# Altium PCB IMOB_TAG_hv2.PcbDoc
Units mm, origin at the board's own origin, x right, y up, seen from the top; angles counter-clockwise.
Board outline 26.1 x 35 mm, 2 copper layers (Top Layer, Bottom Layer); 33 components, 23 nets, 104 pads, 134 vias.
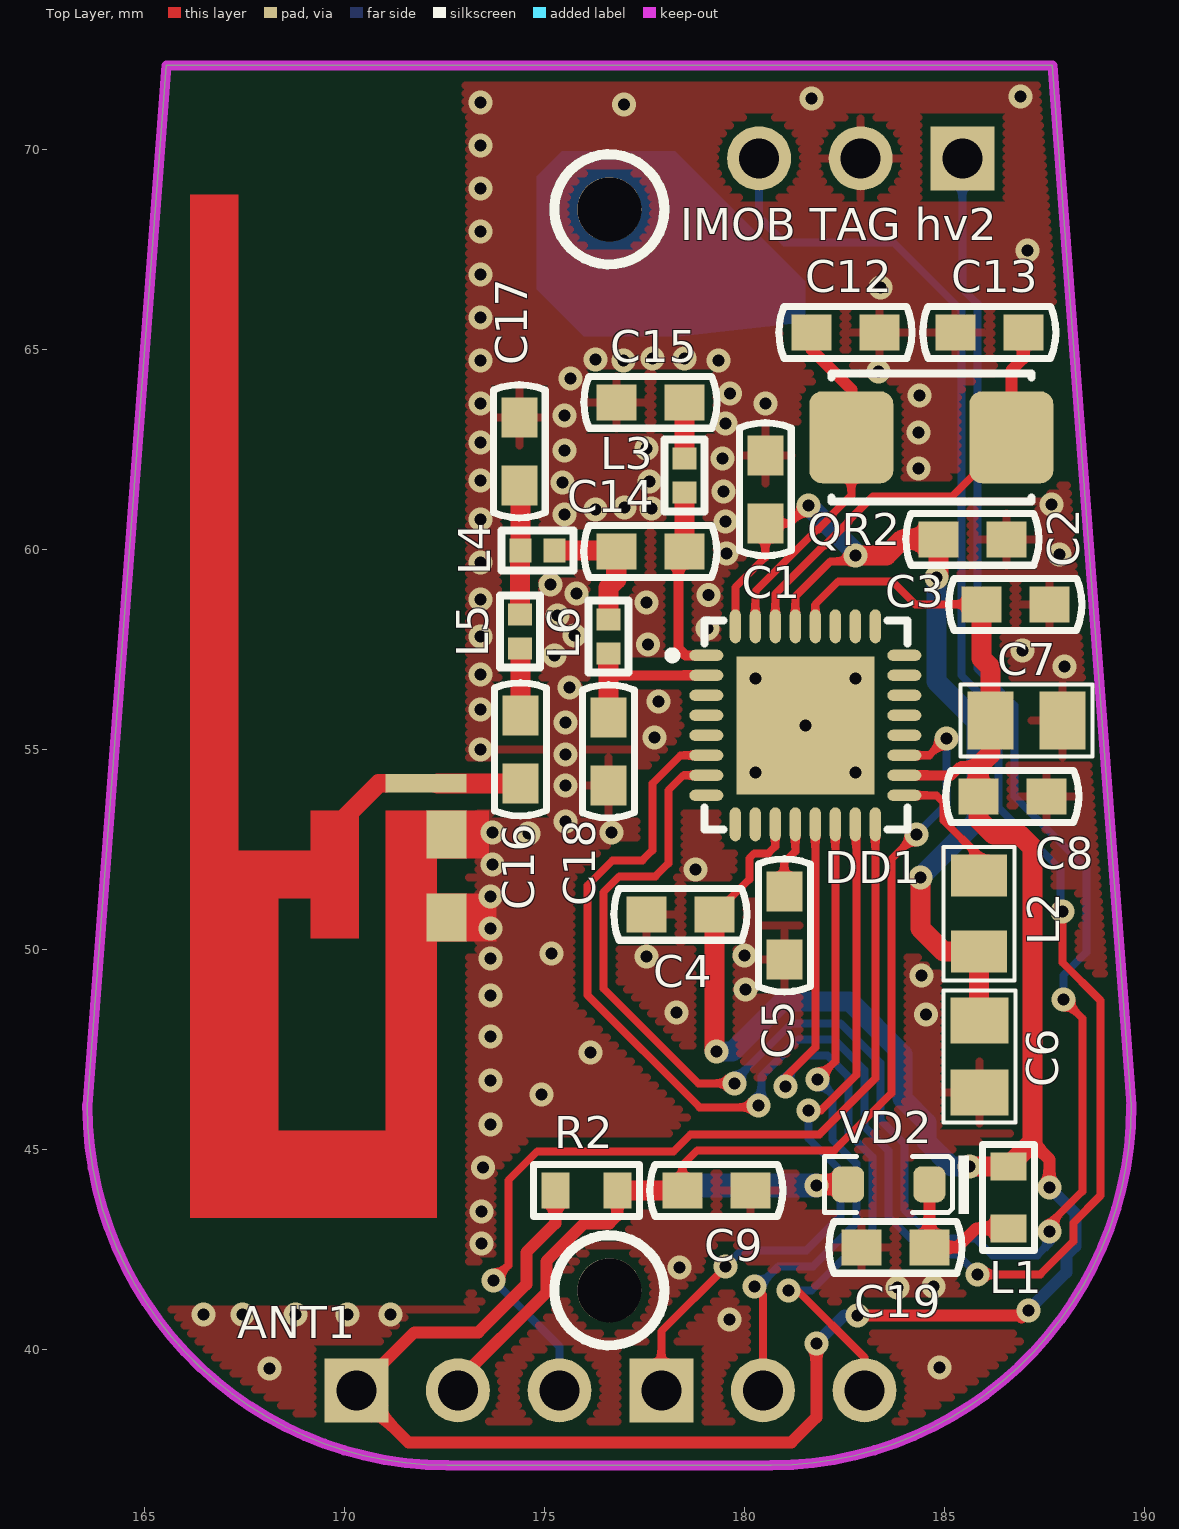
[diagram p0: Top Layer view]
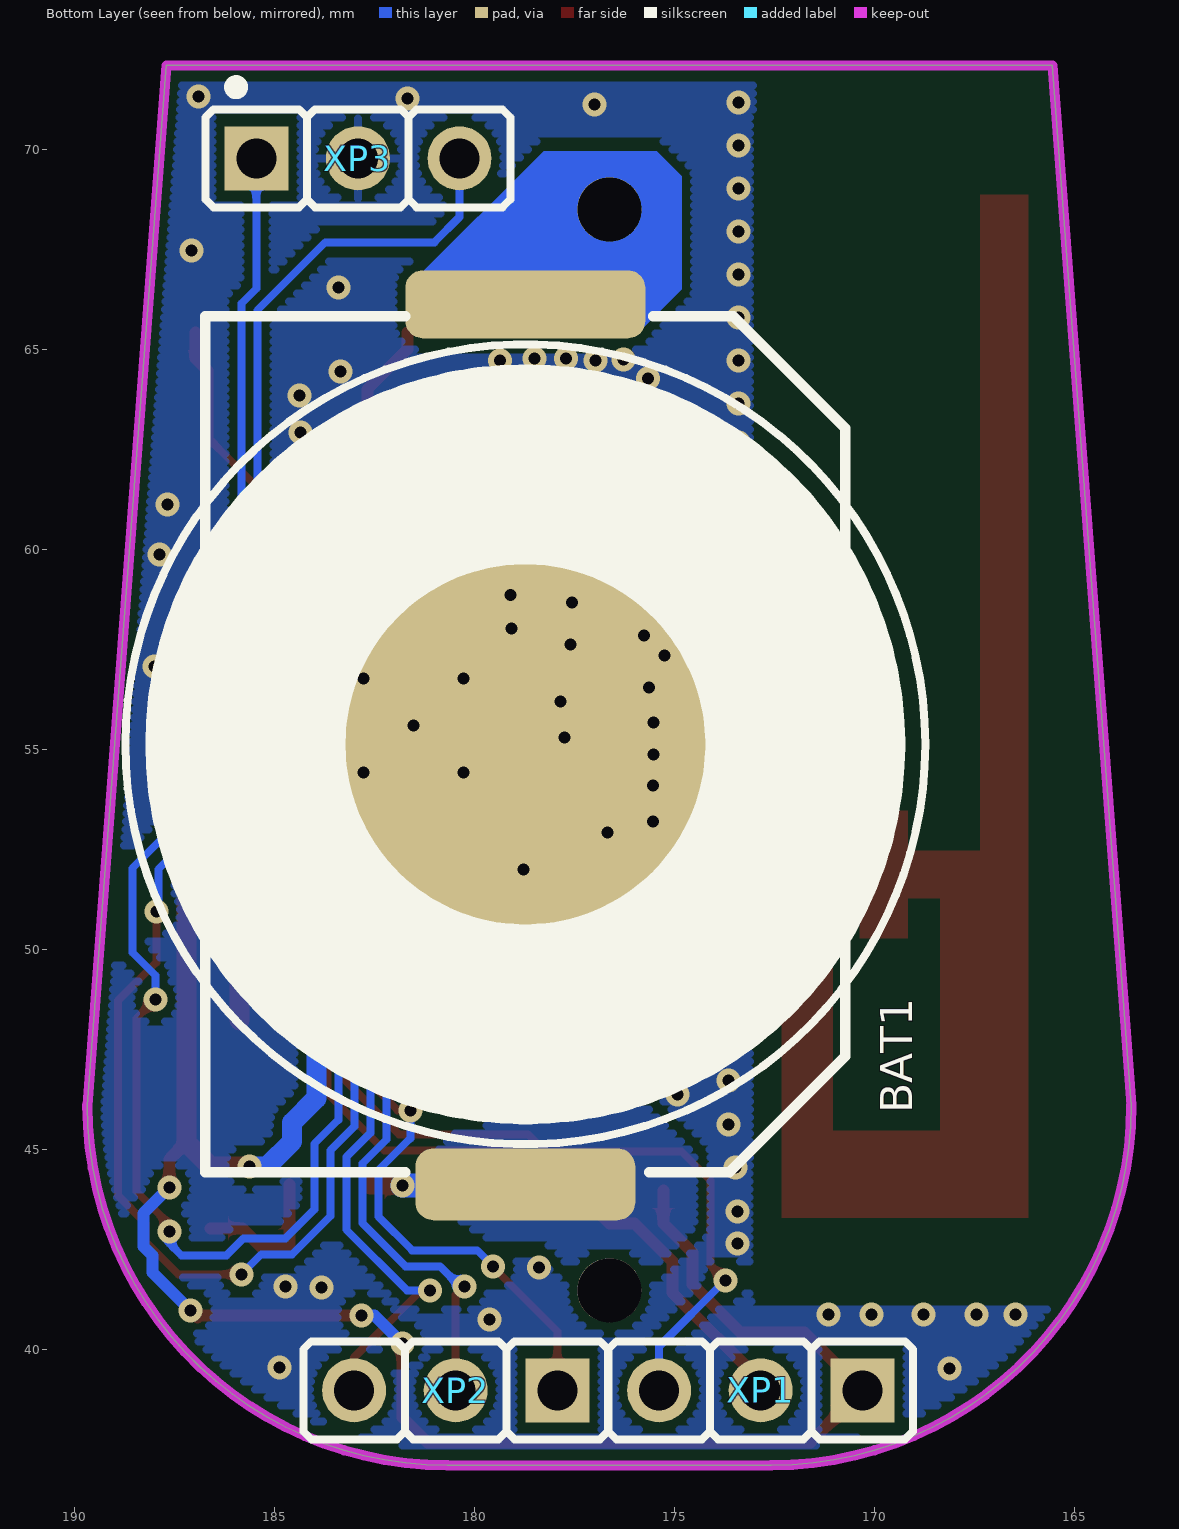
[diagram p1: Bottom Layer view, seen from below]
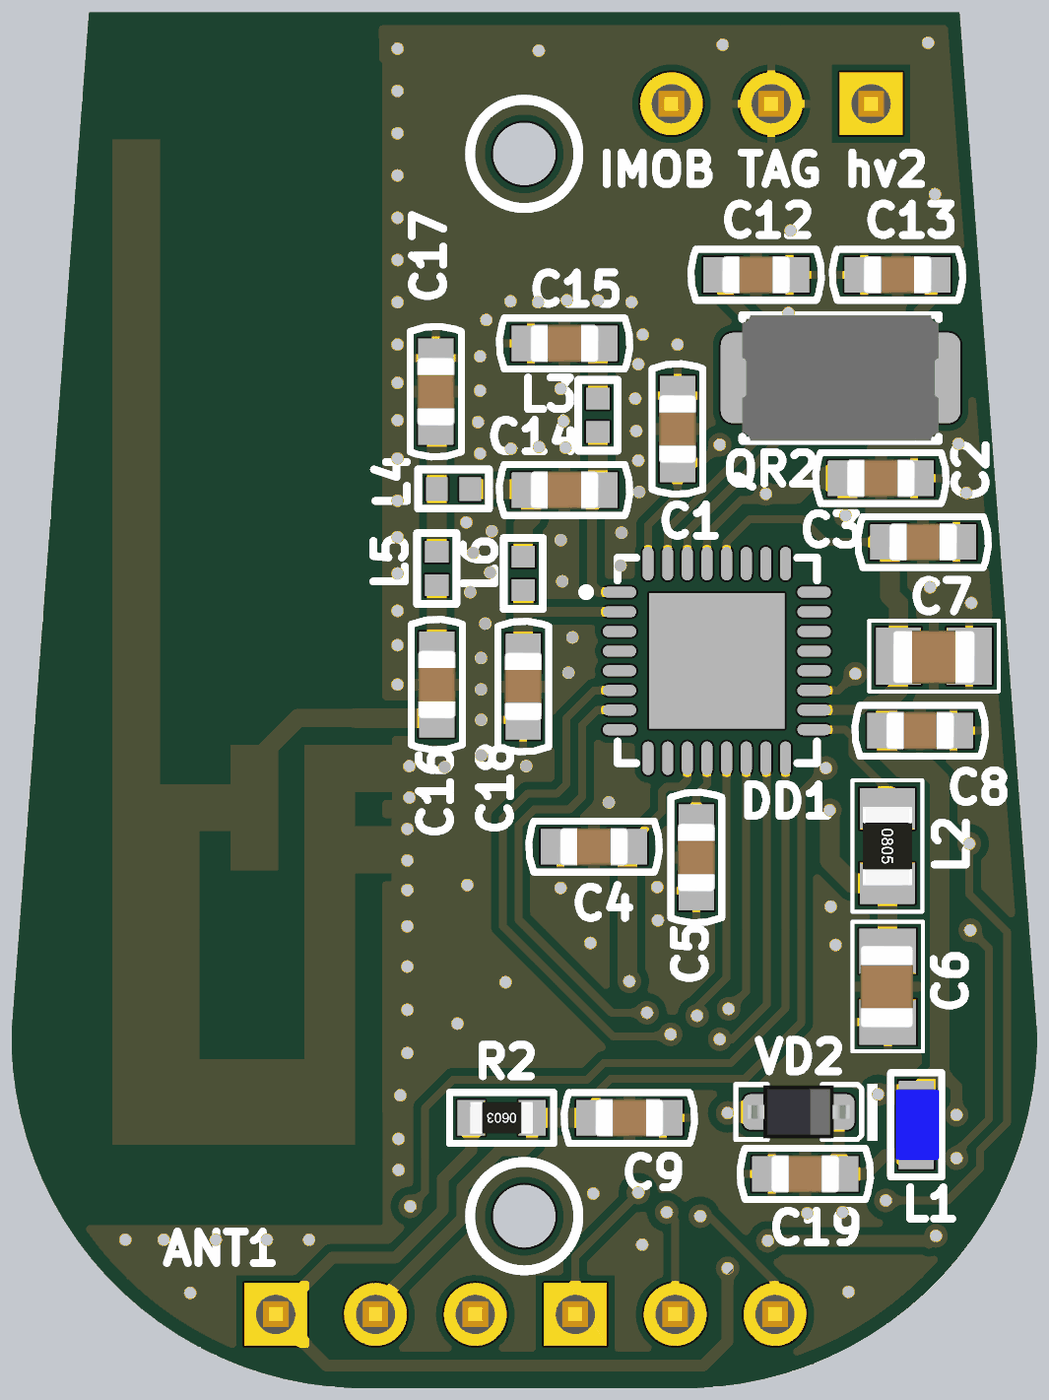
[diagram p2: 3D render of the assembled board from above, using the file's embedded part models]
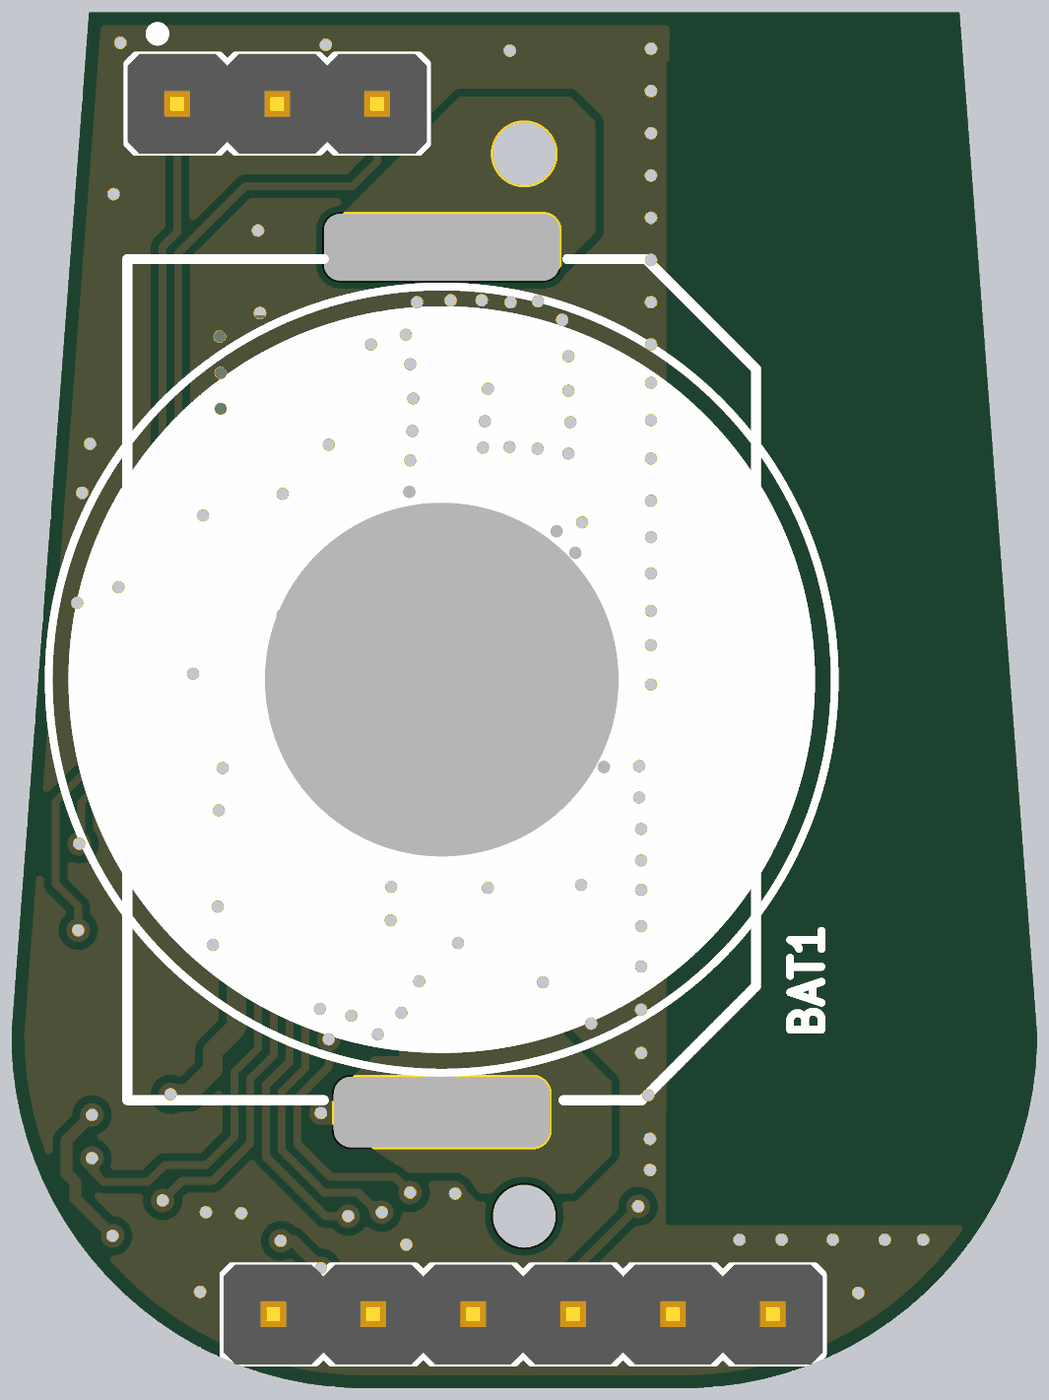
[diagram p3: 3D render of the assembled board from below, using the file's embedded part models]

## Layer stack, top to bottom
Top Solder: solder mask 0.0102, Solder Resist, Dk 3.5
Top Layer: signal copper 0.0356
Dielectric 1: dielectric 0.32, FR-4, Dk 4.8
Bottom Layer: signal copper 0.0356
Bottom Solder: solder mask 0.0102, Solder Resist, Dk 3.5

## Board outline
163.575,46.1 ccw(c172.575,46.1) 172.575,37.1 180.675,37.1 ccw(c180.675,46.1) 189.675,46.1 187.7,72.1 165.55,72.1

## Design rules (kind name [scope] priority, off if disabled: settings)
Clearance [All] p1: gap=0.2 ignorepadtopadclearanceinfootprint=FALSE
ComponentClearance [All] p1: gap=0.05 collisioncheckmode=3 verticalgap=2540 showdistances=FALSE
HoleToHoleClearance [All] p1: gap=0.05 allowstackedmicrovias=TRUE
MinimumSolderMaskSliver [All] p1: minsoldermaskwidth=0.05
PolygonConnect DIRECT [InComponent('BAT1')] p1: connectstyle=Direct reliefconductorwidth=0.254 reliefentries=4 polygonreliefangle="90 Angle" airgapwidth=0.254
PolygonConnect VIA [IsVia] p2: connectstyle=Direct reliefconductorwidth=0.254 reliefentries=4 polygonreliefangle="90 Angle" airgapwidth=0.254
PolygonConnect [All] p3: connectstyle=Relief reliefconductorwidth=0.2 reliefentries=4 polygonreliefangle="90 Angle" airgapwidth=0.2
RoutingVias [All] p1: holewidth=0.4 width=0.8 viastyle="Through Hole" minholewidth=0.3 minwidth=0.6 maxholewidth=0.5 maxwidth=1
ShortCircuit ANTENNA [InComponent('ANT1')] p1: allowed=TRUE
ShortCircuit [All] p2: allowed=FALSE
SilkToSilkClearance [All] p1: silktosilkclearance=0.05
SilkToSolderMaskClearance [IsPad] p1: minsilkscreentomaskgap=0.05 clearancetoexposedcopper=TRUE
SolderMaskExpansion [All] p1: expansion=0.102
Width [All] p1: maxlimit=3 minlimit=0.2 preferedwidth=0.5
24 further rules are at their usual default settings.

## Classes and differential pairs
component class [5]-CONNECTORS: BAT1 C19 VD2 XP1 XP2 XP3
component class [4]-RF: ANT1 C14 C15 C16 C17 C18 L3 L4 L5 L6
component class [3]-MCU: C1 C2 C3 C4 C5 C6 C7 C8 C9 C12 C13 DD1 L1 L2 QR2 R2

## Components (designator, comment, footprint, x,y, rotation, side; value= is the part's Value field where it differs from the comment)
ANT1 "IFA_TI_2.4G_Reference" ANT_IFA_2.4G_BEST 172.98,54.15 r90 top
BAT1 "3034TR" 3034-TR 178.625,55.125 r90 bottom locked
C1 "0.1uF" CC0603 180.525,61.5 r90 top
C2 "0.1uF" CC0603 185.7,60.25 r0 top
C3 "0.1uF" CC0603 186.775,58.625 r180 top
C4 "0.1uF" CC0603 178.4,50.875 r0 top
C5 "1uF" CC0603 181,50.6 r270 top
C6 "10uF" CC0805 185.875,47.315 r90 top
C7 "10uF" CC0805 187.05,55.725 r180 top
C8 "0.1uF" CC0603 186.7,53.825 r180 top
C9 "0.1uF" CC0603 179.3,43.975 r180 top
C12 "22pF" CC0603 182.525,65.423 r0 top
C13 "22pF" CC0603 186.125,65.425 r180 top
C14 "1pF" CC0603 177.65,59.95 r180 top
C15 "6.8pF" CC0603 177.65,63.675 r0 top
C16 "12pF" CC0603 174.4,55 r270 top
C17 "1pF" CC0603 174.375,62.45 r90 top
C18 "1pF" CC0603 176.6,54.95 r270 top
C19 "0.1uF" CC0603 183.775,42.55 r0 top
DD1 "CC2650" QFN32_TI 179.05,57.35 r0 top
Designator4 "Comment" Keystone_2991 201.875,56.025 r0 top
L1 "BLM18HE152SN1" L0603 186.6,43.8 r90 top
L2 "10uH" RC0805 185.865,50.89 r270 top
L3 "2.4nH" L0402 178.5,61.85 r270 top
L4 "2nH" L0402 174.825,59.975 r180 top
L5 "2nH" L0402 174.397,57.95 r270 top
L6 "2.4nH" L0402 176.6,57.825 r90 top
QR2 "SJK-6L-24.0" AC5032_2 184.675,62.8 r0 top
R2 "100k" RC0603 176.05,43.975 r180 top
VD2 "PMEG1020EJ" SOD323 183.609,44.125 r0 top
XP1 "n.p" PLS-03 170.3,38.975 r0 bottom
XP2 "n.p" PLS-03 177.925,38.975 r0 bottom
XP3 "n.p" PLS-03 185.45,69.775 r180 bottom

## Footprints (in the part's own frame and the unit in brackets; to place one, negate y for a bottom-side part, rotate by r counter-clockwise, add the part's x,y. Pads: shape width x height; smd on the part's side, far side on the other; paste and mask are expansions set on the pad)
3034-TR [mm] "CR2032 Holder"
  rrect50% 1.8x5.5 smd mask+0.05: 1(-11,0.1)
  rrect50% 1.7x6 smd mask+0.05: 1(11,0.1)
  round 10 smd mask+0.05: 2(0,0.1)
  silkscreen extent -10.7,-9.9 10.7,10.1
AC5032_2 [mm]
  rrect30% 2.1x2.3 smd mask+0.05: 1(-2,0) 2(2,0)
  silkscreen extent -2.5,-1.6 2.5,1.6, body extent -2.5,-1.6 2.5,1.6, height 1.2
ANT_IFA_2.4G_BEST [mm]
  rect 0.46x2.03 smd paste-10 mask+0.05: 1(-0.003,0.937)
  rect 1.2x1 smd paste-10 mask+0.05: 2(-3.35,0.43) 2(-1.285,0.423)
  Top Layer region: -3.883,2.615 -0.683,2.615 -0.683,3.825 -3.883,3.825
  Top Layer region: -8.8,4.624 -1.684,4.624 -1.684,5.8 -8.8,5.8
  Top Layer region: -10.864,0.662 -0.684,0.662 -0.684,1.952 -10.864,1.952
  Top Layer region: -1.884,-0.078 -0.684,-0.078 -0.684,1.952 -1.884,1.952
  Top Layer region: -3.949,-0.078 -2.749,-0.078 -2.749,1.952 -3.949,1.952
  Top Layer region: -10.864,0.662 -8.683,0.662 -8.683,6.832 -10.864,6.832
  Top Layer region: -10.864,5.623 14.716,5.623 14.716,6.832 -10.864,6.832
  Top Layer region: -2.883,3.7 -1.684,3.7 -1.684,4.7 -2.883,4.7
  Top Layer pour cut-out: -12.914,7.493 -12.914,-0.132 16.769,-0.132 16.769,7.493
  Top Layer lines w0.2: -0.003,2.118 -0.003,1.2
  Top Layer lines w0.46: -0.931,3.046 -0.003,2.118 -0.003,1.952
  Bottom Layer pour cut-out: -12.914,7.493 -12.914,-0.132 16.769,-0.132 16.769,7.493
CC0603 [mm]
  rect 1x0.9 smd paste-25.4 mask+0.05: 1(-0.85,0) 2(0.85,0)
  silkscreen extent -1.66,-0.65 1.66,0.65, body extent -0.87,-0.47 0.88,0.48, height 0.85
CC0805 [mm]
  rect 1.15x1.45 smd paste-25.4 mask+0.05: 1(-0.9,0) 2(0.9,0)
  silkscreen extent -1.65,-0.9 1.65,0.9, body extent -1.05,-0.65 1.05,0.7, height 1.1
Keystone_2991 [mm]
  rect 1.57x1.52 smd: 1(0,0) 1(9.35,0)
  silkscreen extent -1.1,-3.22 10.43,3.12
L0402 [mm]
  rect 0.55x0.6 smd mask+0.05: 1(-0.425,0) 2(0.425,0)
  silkscreen extent -0.9,-0.5 0.9,0.5
L0603 [mm]
  rect 0.7x0.9 smd paste-25.4 mask+0.05: 1(-0.775,0) 2(0.774,0)
  silkscreen extent -1.32,-0.65 1.33,0.65, body extent -0.9,-0.58 0.9,0.54, height 1
PLS-03 [mm]
  rect 1.6x1.6 hole 1 mask+0.05: 1(0,0)
  round 1.6 hole 1 mask+0.05: 2(2.54,0) 3(5.08,0)
  silkscreen extent -1.27,-1.23 6.35,1.23, body extent -1.27,-1.27 6.35,1.27, height 10.1
QFN32_TI [mm]
  oval 0.85x0.28 smd mask+0.05: 1(0,0) 2(0,-0.5) 3(0,-1) 4(0,-1.5) 5(0,-2) 6(0,-2.5) 7(0,-3) 8(0,-3.5) 17(4.95,-3.5) 18(4.95,-3) 19(4.95,-2.5) 20(4.95,-2) 21(4.95,-1.5) 22(4.95,-1) 23(4.95,-0.5) 24(4.95,0)
  oval 0.28x0.85 smd mask+0.05: 9(0.725,-4.225) 10(1.225,-4.225) 11(1.725,-4.225) 12(2.225,-4.225) 13(2.725,-4.225) 14(3.225,-4.225) 15(3.725,-4.225) 16(4.225,-4.225) 25(4.225,0.725) 26(3.725,0.725) 27(3.225,0.725) 28(2.725,0.725) 29(2.225,0.725) 30(1.725,0.725) 31(1.225,0.725) 32(0.725,0.725)
  rect 3.45x3.45 smd mask+0.05: 33(2.475,-1.75)
  silkscreen extent -0.95,-4.35 5.02,0.87
RC0603 [mm]
  rect 0.7x0.9 smd paste-25.4 mask+0.05: 1(-0.775,0) 2(0.774,0)
  silkscreen extent -1.32,-0.65 1.33,0.65, body extent -0.8,-0.4 0.8,0.4, height 0.45
RC0805 [mm]
  rect 1.05x1.4 smd paste-25.4 mask+0.05: 1(-0.95,0) 2(0.95,0)
  silkscreen extent -1.67,-0.89 1.67,0.89, body extent -1,-0.62 1,0.63, height 0.6
SOD323 [mm]
  rrect50% 0.8x0.9 smd mask+0.05: 1(-1.016,0) 2(1.016,0)
  silkscreen extent -1.6,-0.74 2,0.72, body extent -1.3,-0.67 1.3,0.67, height 1.1

## Part data
ANT1: library part ANT_WiFi_IFA_BEST
BAT1: library part 3034, "CR2032 holder smd"
C1 C2 C3 C4 C5 C8 C9 C12 C13 C14 C15 C16 C17 C18 C19: library part CC0603, "CC0603"
C6 C7: library part CC0805, "CC0805"
DD1: library part CC2650RHB, "CC2650RHBT"
L1: library part L0603, "L0603"
L2: library part L0805, "L0805"
L3 L4 L5 L6: library part L0402, "L0402"
QR2: library part AC5032_2, "AC5032/2"
R2: library part RC0603, "RC0603"
VD2: library part PMEG2010
XP1 XP2 XP3: library part PLS03, "PLS03"

## Free pads (board coordinates)
  round 1.6 hole 1.6 unplated mask+0.05: 0(176.625,41.475) 0(176.625,68.5)

## Via types
v1: diameter 0.6, hole 0.3, Top Layer to Bottom Layer, tented both sides, 134 vias

## Nets (pads, with @x,y where several pads share a name; then routed paths per layer and width w, separated by ;. In a path a pad name is that pad's centre, name@x,y a point inside that pad or via, vN(x,y) a via of type N, cw(c..) or ccw(c..) an arc to the next point about the centre after c; other vN are vias at no path point)
+3V: C19.2 L1.1 VD2.2 | length 3.7
  Top Layer w0.3: VD2.2 C19.2 185.325,42.55 185.8,43.025 L1.1
+3V_F: C3.2 C4.2 C7.2 C8.2 DD1.11 DD1.18 DD1.28 L1.2 R2.2 XP1.1 | length 72.5
  Top Layer w0.2: C4.2 180.125,51.75 180.125,52.275 180.25,52.4 180.6,52.4 180.775,52.575 DD1.11 ; DD1.28 181.775,58.625 182.35,59.2 183.7,59.2 184.275,58.625 C3.2
  Top Layer w0.25: DD1.18 185.175,54.35 185.4,54.575 185.85,54.575
  Top Layer w0.3: R2.2 175.276,43.151 174.55,42.425 174.55,41.625 173.35,40.425 171.75,40.425 XP1.1 171.6,37.675 181.175,37.675 181.8,38.3 v1(181.8,40.15) ; v1(182.825,40.85) 186.875,40.85 186.925,40.8 v1(187.1,40.975) ; 187.2,45.174 187.625,44.749 v1(187.625,44.05)
  Top Layer w0.5: C4.2 179.25,47.5 v1(179.3,47.45) ; v1(185.625,44.575) 186.599,44.575 187.2,45.174 187.2,52.55 186.875,52.875 186.225,52.875 185.85,53.25 C8.2 185.85,54.575 186.15,54.875 C7.2 186.15,57.05 185.925,57.275 C3.2
  Bottom Layer w0.3: v1(181.8,40.15) 182.5,40.85 v1(182.825,40.85) ; v1(187.1,40.975) 188.05,41.925 188.05,42.348 188.275,42.574 188.275,43.4 v1(187.625,44.05)
  Bottom Layer w0.5: v1(179.3,47.45) 179.708,47.45 180.958,48.7 182.633,48.7 183.95,47.383 183.95,46.275 184.553,45.672 184.553,45.197 185.175,44.575 v1(185.625,44.575)
BT_RX: DD1.7 XP3.1 | length 53.6
  Top Layer w0.2: DD1.7 178.475,54.35 178.1,53.975 178.1,52.15 177.775,51.825 176.875,51.825 176.475,51.425 176.475,49.025 178.85,46.65 v1(179.75,46.65) ; v1(187.625,42.95) 187.625,43.125 188.45,43.95 188.45,48.275 v1(187.975,48.75)
  Bottom Layer w0.2: v1(179.75,46.65) 179.75,46.714 181.186,48.15 182.405,48.15 183.4,47.155 183.4,45.738 184,45.138 184,43.494 184.719,42.775 185.774,42.775 186.199,42.35 187.325,42.35 187.625,42.65 v1(187.625,42.95) ; XP3.1 185.45,66.516 185.825,66.141 185.825,57.018 186.75,56.093 186.75,53.825 188.55,52.025 188.55,49.925 187.975,49.35 v1(187.975,48.75)
BT_TX: DD1.6 XP3.3 | length 59.5
  Top Layer w0.2: DD1.6 178.409,54.85 177.7,54.141 177.7,52.475 177.45,52.225 176.709,52.225 176.075,51.591 176.075,48.859 178.884,46.05 180.3,46.05 v1(180.35,46.1) ; v1(185.825,41.875) 187.4,41.875 188.225,42.7 188.225,43.159 188.908,43.842 188.908,48.717 187.95,49.675 v1(187.95,50.95)
  Bottom Layer w0.2: v1(180.35,46.1) 180.425,46.175 180.425,46.824 181.351,47.75 182.239,47.75 183,46.989 183,45.572 183.6,44.972 183.6,43.328 184.553,42.375 185.325,42.375 v1(185.825,41.875) ; XP3.3 180.37,68.305 181,67.675 183.725,67.675 185.425,65.975 185.425,56.853 186.35,55.928 186.35,53.55 187.9,52 187.9,51 v1(187.95,50.95)
GND: ANT1.2 BAT1.2 C1.2 C2.2 C3.1 C4.1 C5.2 C6.1 C7.1 C8.1 C9.1 C12.2 C13.2 C15.1 C17.2 C18.2 C19.1 DD1.33 XP3.2
  other v1: 168.125,39.524 184.875,39.55 179.625,40.75 166.475,40.875 167.452,40.875 168.775,40.875 170.075,40.875 171.15,40.875 183.825,41.55 184.725,41.575 178.383,42.05 173.425,42.65 173.425,43.442 173.47,44.55 173.65,45.625 174.925,46.375 173.65,46.725 176.15,47.425 173.65,47.825 184.547,48.375 178.309,48.425 173.65,48.85 180.025,49 184.425,49.35 173.65,49.775 177.55,49.825 180.009,49.85 175.175,49.9 173.65,50.525 173.65,51.325 178.775,52 173.7,52.125 174.6,52.9 173.7,52.925 176.675,52.925 175.53,53.2 175.53,54.1 180.275,54.425 182.774,54.425 175.525,54.875 173.4,55 177.75,55.3 181.525,55.6 175.525,55.675 173.4,56 177.851,56.2 175.633,56.55 180.275,56.775 182.774,56.775 173.4,56.875 188,57.075 175.25,57.35 186.95,57.475 177.592,57.625 173.4,57.825 175.757,57.85 179.075,58.025 175.325,58.35 177.554,58.675 173.4,58.75 179.1,58.861 175.8,58.9 175.15,59.125 173.4,59.675 187.875,59.875 179.55,59.9 179.527,60.7 173.4,60.75 175.5,60.875 176.285,61 177,61.043 177.675,61.025 187.675,61.125 179.475,61.45 175.45,61.675 177.625,61.7 173.4,61.725 184.35,62.016 179.45,62.275 175.5,62.475 177.55,62.525 173.4,62.675 184.35,62.925 179.527,63.15 175.5,63.35 173.4,63.65 180.525,63.65 184.375,63.85 179.641,63.9 175.658,64.275 183.35,64.45 173.4,64.725 176.975,64.725 179.355,64.725 176.275,64.75 177.709,64.775 178.5,64.775 173.4,65.8 183.4,66.55 173.4,66.875 187.075,67.475 173.4,67.95 173.4,69.025 173.4,70.1 176.994,71.125 173.4,71.175 181.675,71.275 186.9,71.325
NetANT1_1: ANT1.1 C16.2 | length 2.1
  Top Layer w0.5: ANT1.1@172.33,54.147 174.397,54.147 C16.2
NetBAT1_1: BAT1.1@178.725,44.125 VD2.1 | length 3.9
  Top Layer w0.5: v1(181.8,44.1) 181.825,44.125 VD2.1
  Bottom Layer w0.5: BAT1.1@178.725,44.125 BAT1.1@178.75,44.1
  Bottom Layer w0.6: BAT1.1@178.75,44.1 v1(181.8,44.1)
NetC1_1: C1.1 C2.1 C6.2 DD1.29 DD1.32 L2.2 | length 25
  Top Layer w0.2: DD1.32 179.775,59.05 180.525,59.8 C1.1 181.15,60.65 v1(181.6,61.1) ; DD1.29 181.275,58.819 182.156,59.7 182.625,59.7 v1(182.775,59.85)
  Top Layer w0.5: v1(182.775,59.85) 183.55,59.85 183.95,60.25 C2.1 184.85,59.35 v1(184.8,59.3) ; v1(184.4,51.8) 184.4,50.525 184.985,49.94 L2.2 185.865,48.225 C6.2
  Bottom Layer w0.5: v1(181.6,61.1) 182.775,59.925 v1(182.775,59.85) ; v1(184.4,51.8) 185.8,53.2 185.8,55.7 184.8,56.7 v1(184.8,59.3)
NetC5_1: C5.1 DD1.12 | length 1.8
  Top Layer w0.2: C5.1 181,52.175 181.275,52.45 DD1.12
NetC9_2: C9.2 DD1.19 R2.1 XP1.2 | length 25.9
  Top Layer w0.2: C9.2 178.45,44.6 178.825,44.975 182.25,44.975 183.675,46.4 183.675,52.25 v1(184.3,52.875) ; DD1.19 184.625,54.85 v1(185.05,55.275)
  Top Layer w0.3: XP1.2 172.84,39.208 175.05,41.418 175.05,42.2 176.001,43.151 176.626,43.151 176.825,43.35 R2.1
  Top Layer w0.5: R2.1 C9.2
  Bottom Layer w0.2: v1(184.3,52.875) 185.05,53.625 v1(185.05,55.275)
NetC12_1: C12.1 DD1.31 QR2.1 | length 8.8
  Top Layer w0.2: DD1.31 180.275,58.95 181.825,60.5 181.849,60.5 182.2,60.851 182.2,60.875 182.675,61.35 QR2.1
  Top Layer w0.3: C12.1 181.675,65 182.675,64 QR2.1
NetC13_1: C13.1 DD1.30 QR2.2 | length 11.1
  Top Layer w0.2: DD1.30 180.775,58.884 181.991,60.1 182.014,60.1 182.6,60.686 182.6,60.709 183.216,61.325 185.2,61.325 QR2.2
  Top Layer w0.3: QR2.2 186.675,64.475 186.975,64.775 C13.1
NetC14_2: C14.2 L4.1 L6.2 | length 3.3
  Top Layer w0.5: L4.1 176.775,59.975 C14.2 176.8,59.25 176.6,59.05 L6.2
NetC15_2: C15.2 L3.1 | length 1.4
  Top Layer w0.5: L3.1 C15.2
NetC16_1: C16.1 L5.2 | length 1.7
  Top Layer w0.5: L5.2 174.4,57.522 C16.1
NetC17_1: C17.1 L4.2 L5.1 | length 3.2
  Top Layer w0.5: C17.1 174.4,61.575 L4.2 174.397,59.972 L5.1
NetDD1_17: DD1.17 L2.1 | length 3.3
  Top Layer w0.2: DD1.17 184.8,53.85 184.975,53.675 184.975,53.225 185.865,52.335 L2.1
RF_N: C18.1 DD1.2 L6.1 | length 4.1
  Top Layer w0.25: 176.6,56.875 176.625,56.85 DD1.2
  Top Layer w0.5: C18.1 176.6,56.875 L6.1
RF_P: C14.1 DD1.1 L3.2 | length 4.7
  Top Layer w0.25: C14.1 178.35,59.8 178.35,57.525 178.525,57.35 DD1.1
  Top Layer w0.5: C14.1 L3.2
TCK: DD1.14 XP2.2 | length 16.5
  Top Layer w0.2: v1(180.25,41.575) 180.465,41.36 XP2.2 XP2.2@180.45,38.99 ; v1(181.825,46.75) 182.275,47.2 DD1.14
  Bottom Layer w0.2: v1(180.25,41.575) 180.357,41.575 180.857,42.075 181.719,42.075 182.8,43.156 182.8,44.641 182.2,45.241 182.2,46.375 v1(181.825,46.75)
TDI: DD1.16 XP1.3 | length 22.7
  Top Layer w0.2: v1(173.725,41.725) 174.1,42.1 174.1,44.225 174.825,44.95 178.234,44.95 178.659,45.375 181.881,45.375 183.275,46.769 DD1.16
  Bottom Layer w0.2: v1(173.725,41.725) 175.38,40.07 XP1.3
TDO: DD1.15 XP2.1 | length 18
  Top Layer w0.2: XP2.1 177.925,40.45 179.527,42.052 v1(179.527,42.075) ; v1(181.6,45.975) 181.916,45.975 182.8,46.859 182.8,53.1 DD1.15
  Bottom Layer w0.2: v1(179.527,42.075) 179.927,42.475 181.554,42.475 182.4,43.321 182.4,44.475 181.6,45.275 v1(181.6,45.975)
TMS: DD1.13 XP2.3 | length 19.4
  Top Layer w0.2: v1(181.025,46.575) 181.025,46.799 181.775,47.549 DD1.13 DD1.13@181.8,53.1 ; v1(181.105,41.475) 181.325,41.475 183.005,39.795 XP2.3
  Bottom Layer w0.2: v1(181.025,46.575) 181.025,46.799 181.576,47.35 182.074,47.35 182.6,46.824 182.6,45.406 183.2,44.806 183.2,42.99 181.685,41.475 v1(181.105,41.475)
pads on no net: BAT1.1@178.725,66.125 DD1.3 DD1.4 DD1.5 DD1.8 DD1.9 DD1.10 DD1.20 DD1.21 DD1.22 DD1.23 DD1.24 DD1.25 DD1.26 DD1.27 Designator4.1

## Polygon pours and split planes (outlines as drawn)
NetBAT1_1 on Bottom Layer "NETBAT1_1_L02_P002" (hatched Horizontal grid 0.2 track 0.2, remove dead copper, pour order 2): 181.175,43.8 181.175,44.705 180.43,45.45 179.7,45.45 179.7,45.838 178.363,47.175 176.814,47.175 174.5,44.861 174.5,43.075 175.425,42.15 177.7,42.15 178.224,42.674 179.561,42.674
GND on Bottom Layer "GND_L02_P010" (hatched Horizontal grid 0.2 track 0.2, remove dead copper, pour order 10): 158.725,75.4 158.8,75.475 196.85,75.475 196.85,39.125 191.675,33.95 161.875,33.95
GND on Bottom Layer "GND_L02_P004" (hatched Horizontal grid 0.2 track 0.2, remove dead copper, pour order 4): 101.825,71.25 102.325,71.75 125.65,71.75 125.65,70.875 130.575,65.95 130.575,41.975 116.55,41.975 114.775,40.2 114.125,40.85 105.55,40.85 99.75,46.65
GND on Top Layer "GND_L01_P008" (hatched Horizontal grid 0.2 track 0.2, remove dead copper, pour order 8): 164.75,74.45 188.2,74.45 190.575,42.975 184.619,36.125 168.375,36.125 161.65,45.375
GND on Top Layer "GND_L01_P006" (hatched Horizontal grid 0.2 track 0.2, remove dead copper, pour order 6): 99.6,72.375 100.475,73.25 131.75,73.25 131.75,36.025 130.3,37.475 97.475,37.475

## Keep-outs
Keep-Out Layer:
  the board outline again, w0.254

## Other copper
Top Layer:
  rectangle net GND: 172.575,52.266 173.621,53.466
  rectangle net GND: 172.65,50.201 173.8,51.4
  pour cut-out: 147.088,41.15 173.026,41.15 173.125,41.249 172.982,85.856
Bottom Layer:
  region: 181.525,65.675 181.523,66.702 178.269,69.956 175.44,69.956 174.809,69.325 174.809,66.499 175.983,65.325 178.4,65.325
  pour cut-out: 147.088,41.15 173.026,41.15 173.125,41.249 172.982,85.856

## Silkscreen, mask and mechanical layers (free items; w line width, h text height)
Top Overlay:
  circle w0.254: c176.625,68.5 r1.377
  circle w0.254: c176.625,41.475 r1.377
  text "IMOB TAG hv2" at 178.403,67.725 h0.8
Bottom Overlay:
  circle w5: c178.725,55.125 r7